# EAGLE board Tea Cabinet (EAGLE 5.11)
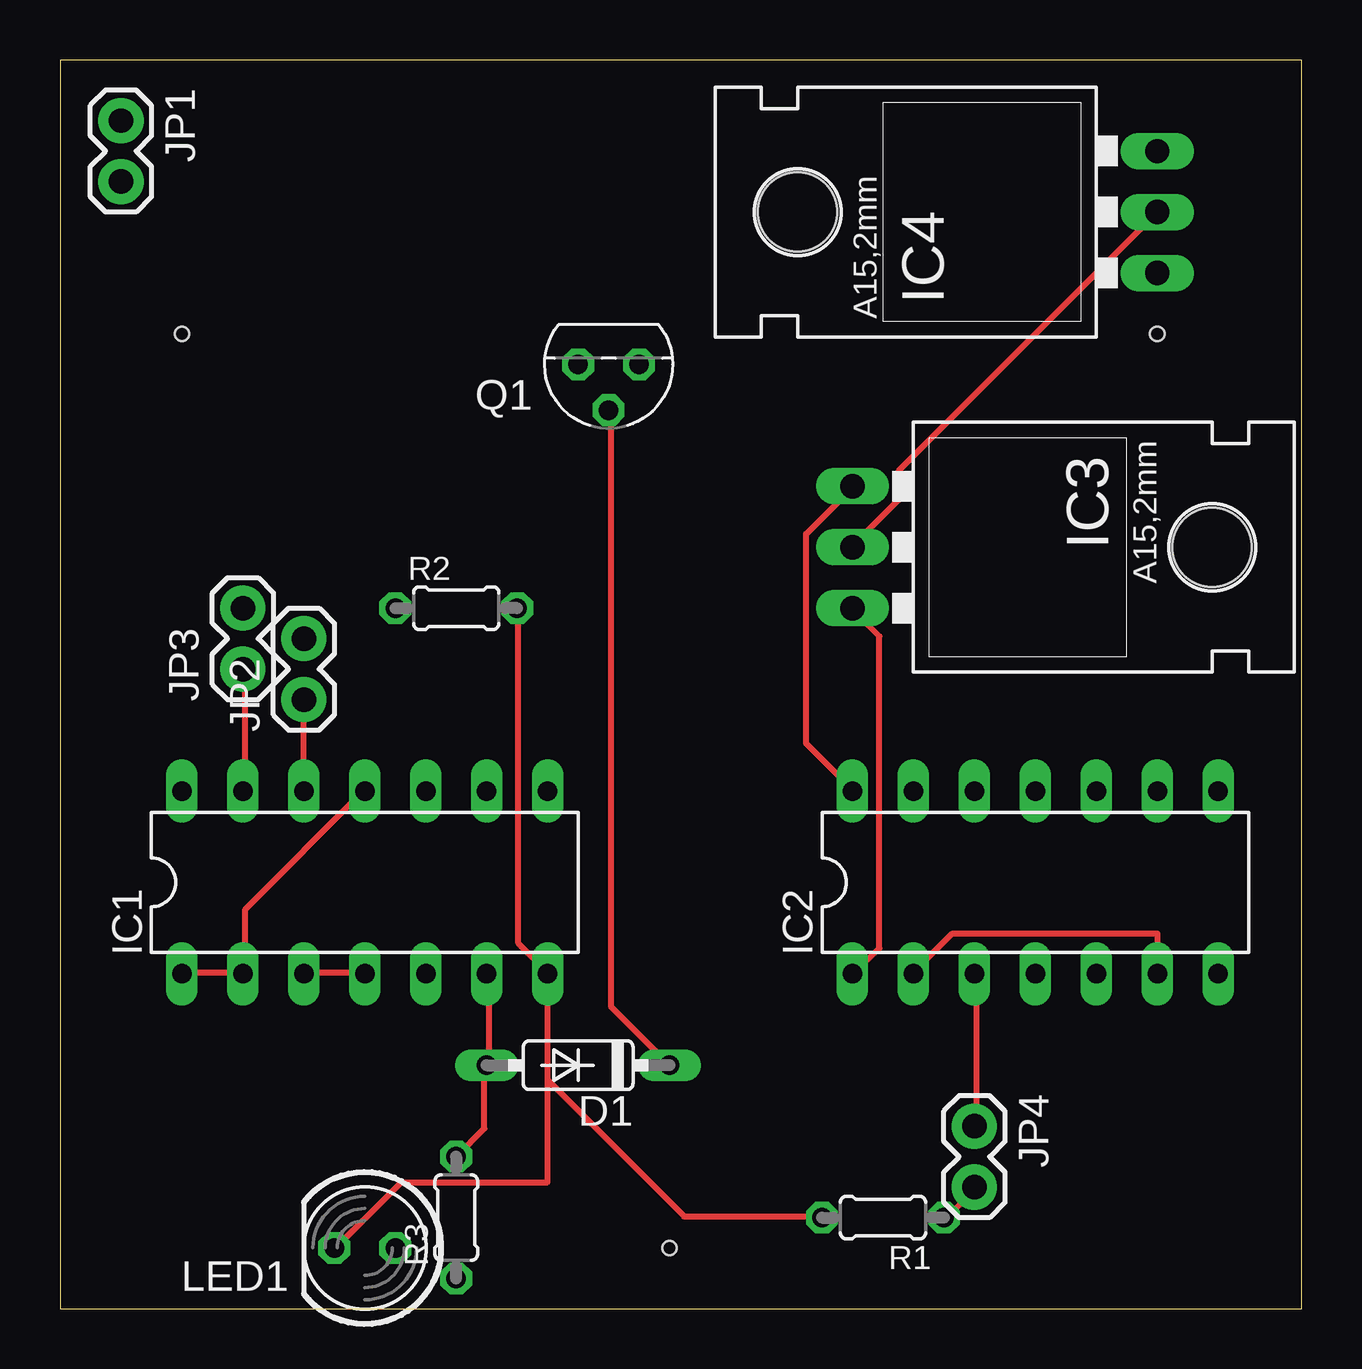
[diagram p0: board, top side]
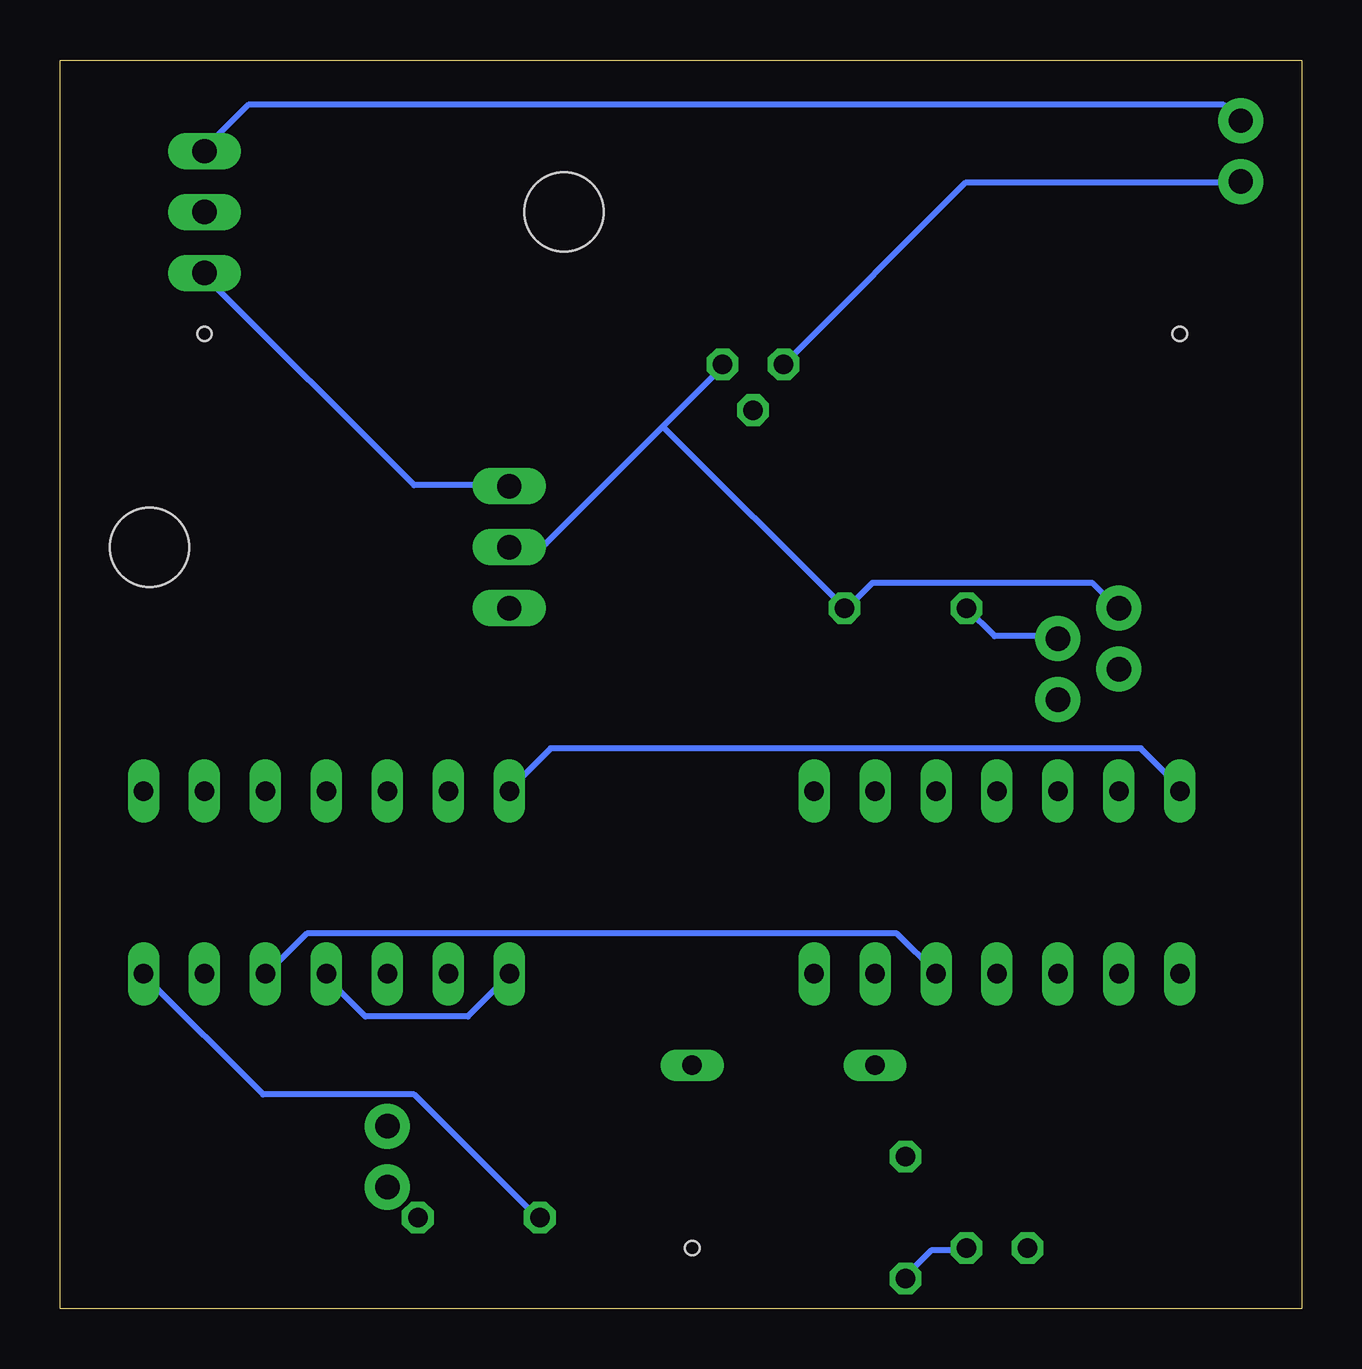
[diagram p1: board, bottom side, seen from below]

Size 51.74 x 52.06 mm. Coordinates in mm from the lower left corner, seen from the top.
Outline: 0,0 51.74,0 51.74,52.06 0,52.06 0,0
Copper layers (1*16): Top 0.035mm / dielectric 1.5mm / Bottom 0.035mm
Design rules "default": minimum track width 10mil, minimum drill 24mil, track to track 8mil, track to pad 8mil, pad to pad 8mil, via to via 8mil, smd to smd 8mil, copper to edge 40mil, drill to drill 8mil, minimum pad ring 10mil, minimum via ring 8mil, stop-mask expansion 4mil, vias tented up to drill 0mil, thermal gap 10mil
Holes 0.6 mm at 25.4,2.54 5.08,40.64 45.72,40.64

## Footprints (pad centres in the part's own frame; a part is rotated, then mirrored left to right if it is on the bottom)
DO35-7 = drill 0.813 long: A 3.81,0; C -3.81,0
DIL14 = drill 0.813 long: 1 -7.62,-3.81; 2 -5.08,-3.81; 3 -2.54,-3.81; 4 0,-3.81; 5 2.54,-3.81; 6 5.08,-3.81; 7 7.62,-3.81; 8 7.62,3.81; 9 5.08,3.81; 10 2.54,3.81; 11 0,3.81; 12 -2.54,3.81; 13 -5.08,3.81; 14 -7.62,3.81
78XXL = drill 1.016 long: GND 0,-3.81; IN -2.54,-3.81; OUT 2.54,-3.81 | hole 3.302: 0,11.176
1X02 = drill 1.016 pad 1.88 round: 1 0,0; 2 2.54,0
LED5MM = drill 0.813 octagon: A -1.27,0; K 1.27,0
TO92 = drill 0.813 octagon: 1 1.27,0; 2 0,1.905; 3 -1.27,0
0204/5 = drill 0.813 octagon: 1 -2.54,0; 2 2.54,0

## Placement (x,y rotation side)
D1  1N4148DO35-7  [DO35-7]  21.59,10.16 180 top
IC1  74LS00N  [DIL14]  12.7,17.78 0 top
IC2  74LS74N  [DIL14]  40.64,17.78 0 top
IC3  5V  [78XXL]  36.83,31.75 270 top
IC4  12V  [78XXL]  41.91,45.72 90 top
JP1  [1X02]  2.54,49.53 270 top
JP2  [1X02]  10.16,25.4 90 top
JP3  [1X02]  7.62,26.67 90 top
JP4  [1X02]  38.1,7.62 270 top
LED1  [LED5MM]  12.7,2.54 180 top
Q1  2N3904  [TO92]  22.86,39.37 180 top
R1  10k  [0204/5]  34.29,3.81 180 top
R2  10k  [0204/5]  16.51,29.21 0 top
R3  100  [0204/5]  16.51,3.81 90 top

## Library data of the parts
D1 = diode
IC1 IC2 = 74xx-us
IC3 IC4 = v-reg
JP1-JP4 = SparkFun
LED1 = led
Q1 = transistor-npn
R1-R3 = resistor

## Nets
5V: IC2.1 IC2.4 IC3.OUT
12V: IC4.OUT JP1.1
BACK: IC1.13 JP3.1
DOOR: IC1.12 JP2.1
GND: IC1.7 IC2.7 IC3.GND IC4.GND JP3.2 LED1.K Q1.3 R1.2 R2.2
N$1: LED1.A R3.1
N$2: JP1.2 Q1.1
N$3: D1.C Q1.2
N$4: JP4.2 R1.1
N$5: IC1.1 IC1.2 IC1.11
N$6: D1.A IC1.6 R3.2
N$7: JP2.2 R2.1
N$8: IC2.2 IC2.6
N$9: IC1.5 IC2.5
N$10: IC1.3 IC1.4
RMT: IC2.3 JP4.1
VCC: IC1.14 IC2.14 IC3.IN IC4.IN

## Tracks (layer width: path | path; a pad name or v marks a point on that pad's centre or on a via)
5V
  Top 0.254: IC3.OUT 33.12,29.06 34.14,28.04 34.14,15.04 33.12,14.02 IC2.1
  Bottom 0.254: IC2.1 33.12,13.82 34.75,12.19 39.01,12.19 40.64,13.82 IC2.4
12V
  Bottom 0.254: IC4.OUT 45.72,48.36 43.89,50.19 3.25,50.19 2.64,49.58 JP1.1
BACK
  Top 0.254: IC1.13 7.72,21.74 7.72,26.62 JP3.1
DOOR
  Top 0.254: IC1.12 JP2.1
GND
  Top 0.254: 20.32,9.55 20.32,5.28 14.22,5.28 11.58,2.64 LED1.K | 20.32,9.55 IC1.7 20.32,14.02 19.1,15.24 19.1,29.06 R2.2 | 20.32,9.55 26.01,3.86 31.7,3.86 R1.2 | IC4.GND 34.95,34.95 34.95,33.73 33.12,31.9 IC3.GND
  Bottom 0.254: IC2.7 48.16,13.82 43.28,8.94 36.98,8.94 31.9,3.86 R1.2 | JP3.2 7.72,29.26 8.74,30.28 17.88,30.28 18.9,29.26 R2.2 26.62,36.78 | 26.62,36.78 31.5,31.9 32.92,31.9 IC3.GND | 26.62,36.78 24.18,39.22 Q1.3
N$1
  Bottom 0.254: R3.1 16.46,1.42 15.44,2.44 14.02,2.44 LED1.A
N$2
  Bottom 0.254: Q1.1 14.02,46.94 2.64,46.94 JP1.2
N$3
  Top 0.254: D1.C 22.96,12.6 22.96,37.39 Q1.2
N$4
  Top 0.254: R1.1 36.98,3.86 38,4.88 38,5.08 JP4.2
N$5
  Top 0.254: IC1.1 5.08,14.02 7.52,14.02 IC1.2 7.72,14.02 7.72,16.66 12.6,21.54 IC1.11
N$6
  Top 0.254: R3.2 17.68,7.52 17.68,10.16 D1.A 17.88,10.16 17.88,13.82 IC1.6
N$7
  Bottom 0.254: R2.1 12.8,28.04 10.16,28.04 JP2.2
N$8
  Top 0.254: IC2.2 35.56,14.02 37.19,15.65 45.72,15.65 IC2.6
N$9
  Bottom 0.254: IC1.5 15.24,14.02 16.87,15.65 41.45,15.65 43.08,14.02 IC2.5
N$10
  Top 0.254: IC1.3 10.16,14.02 12.6,14.02 IC1.4
RMT
  Top 0.254: IC2.3 38.2,13.82 38.2,7.72 JP4.1
VCC
  Top 0.254: IC3.IN 32.92,34.14 31.09,32.31 31.09,23.57 32.92,21.74 IC2.14
  Bottom 0.254: IC1.14 5.08,21.74 6.71,23.37 31.29,23.37 32.92,21.74 IC2.14 | IC4.IN 45.72,43.08 36.98,34.34 33.12,34.34 IC3.IN